# Altium PCB NSFTC.PcbDoc
Units mil, origin at the board's own origin, x right, y up, seen from the top; angles counter-clockwise.
Board outline 2283.46 x 1496.06 mil, 2 copper layers (Top Layer, Bottom Layer); 47 components, 70 nets, 256 pads, 10 vias.
Unrouted connection lines stored in the file: 79.
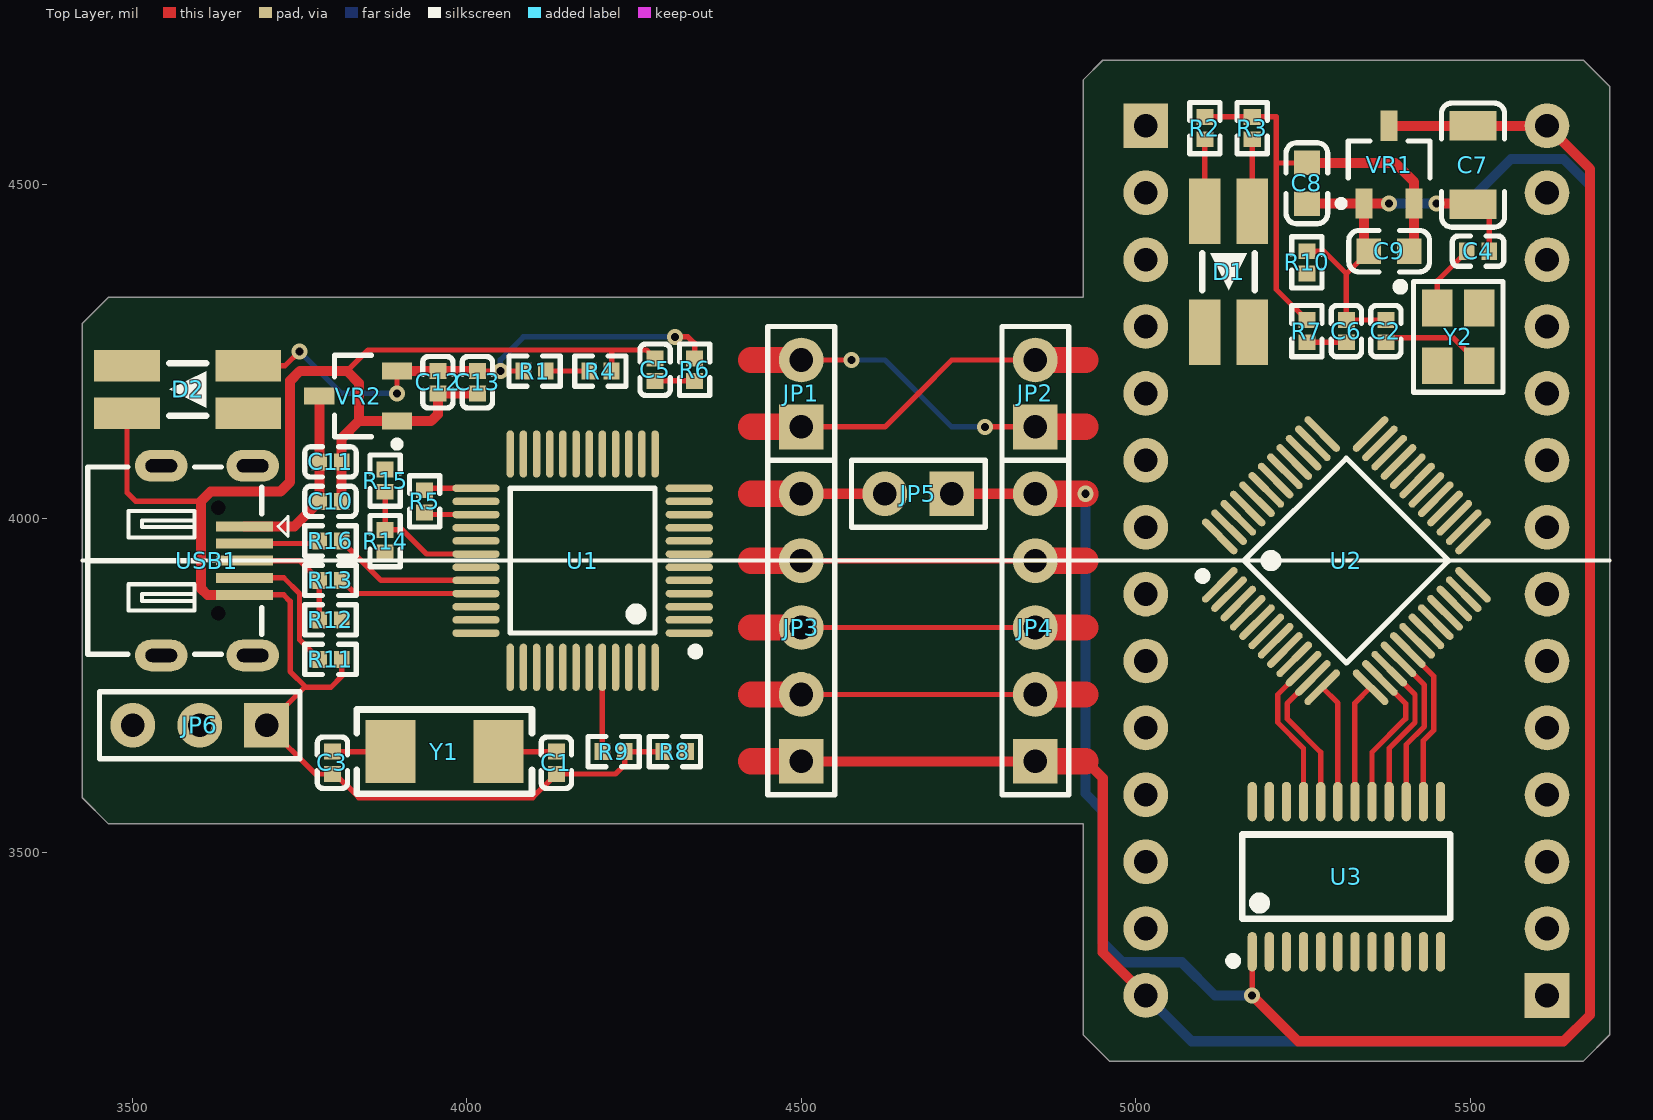
[diagram p0: Top Layer view]
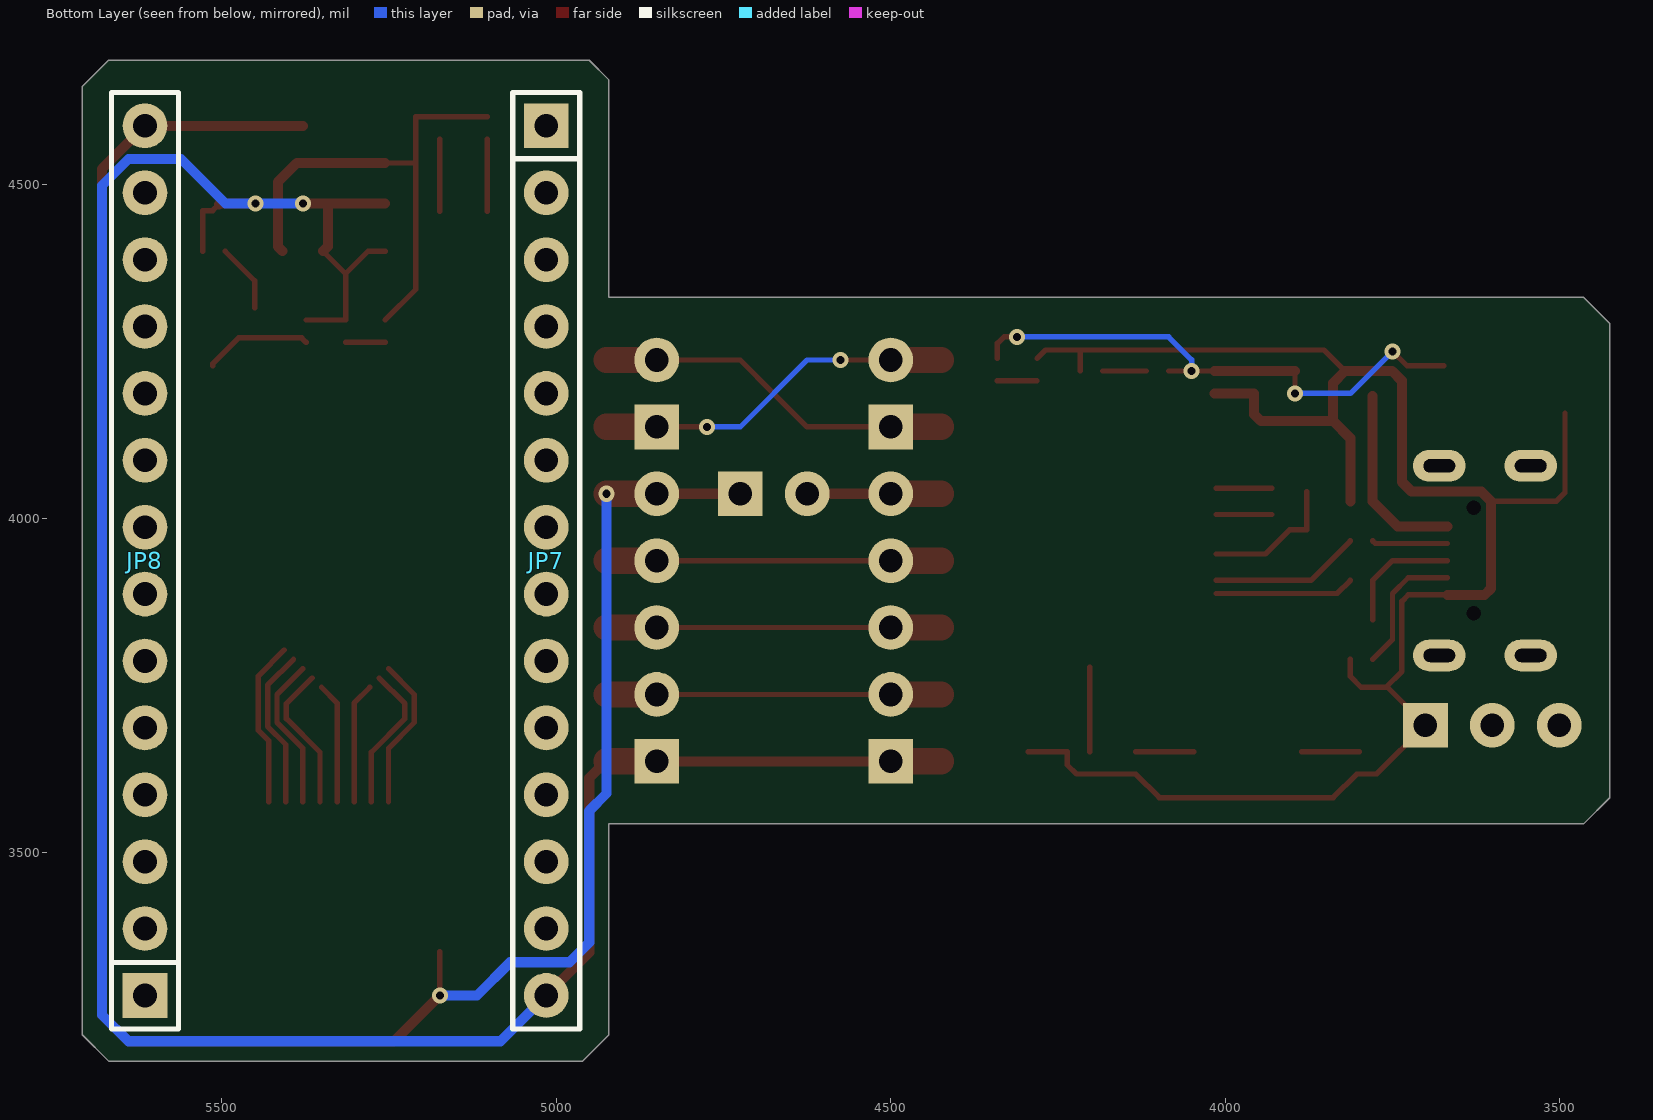
[diagram p1: Bottom Layer view, seen from below]

## Layer stack, top to bottom
Top Solder: solder mask 0.4, Solder Resist, Dk 3.5
Top Layer: signal copper 1.4
Dielectric 1: dielectric 12.6, FR-4, Dk 4.8
Bottom Layer: signal copper 1.4
Bottom Solder: solder mask 0.4, Solder Resist, Dk 3.5

## Board outline
3464.57,3543.31 3425.2,3582.68 3425.2,4291.34 3464.57,4330.71 4921.26,4330.71 4921.26,4655.51 4950.79,4685.04 5669.29,4685.04 5708.66,4645.67 5708.66,3228.35 5669.29,3188.98 4960.63,3188.98 4921.26,3228.35 4921.26,3543.31

## Design rules (kind name [scope] priority, off if disabled: settings)
AssemblyTestpoint AssemblyTestpoint_4 [All] p2: testpointundercomponent=TRUE minsize=40 maxsize=100 preferedsize=60 minholesize=0 maxholesize=40 preferedholesize=32 testpointgrid=1 usegrid=TRUE gridtolerance=0.01 allowsidetop=TRUE allowsidebottom=TRUE
AssemblyTestpoint AssemblyTestpoint_3 [All] p3: testpointundercomponent=TRUE minsize=40 maxsize=100 preferedsize=60 minholesize=0 maxholesize=40 preferedholesize=32 testpointgrid=1 usegrid=TRUE gridtolerance=0.01 allowsidetop=TRUE allowsidebottom=TRUE
AssemblyTestpoint AssemblyTestpoint_2 [All] p4: testpointundercomponent=TRUE minsize=40 maxsize=100 preferedsize=60 minholesize=0 maxholesize=40 preferedholesize=32 testpointgrid=1 usegrid=TRUE gridtolerance=0.01 allowsidetop=TRUE allowsidebottom=TRUE
AssemblyTestpoint AssemblyTestpoint_1 [All] p5: testpointundercomponent=TRUE minsize=40 maxsize=100 preferedsize=60 minholesize=0 maxholesize=40 preferedholesize=32 testpointgrid=1 usegrid=TRUE gridtolerance=0.01 allowsidetop=TRUE allowsidebottom=TRUE
Clearance [All] p1: gap=6 ignorepadtopadclearanceinfootprint=FALSE
HoleSize [All] p1: absolutevalues=TRUE maxlimit=250 minlimit=11.81 maxpercent=80.000 minpercent=20.000
HoleToHoleClearance [All] p1: gap=18 allowstackedmicrovias=TRUE
MinimumSolderMaskSliver [All] p1: minsoldermaskwidth=6
PolygonConnect [All] p1: connectstyle=Relief reliefconductorwidth=10 reliefentries=4 polygonreliefangle="90 Angle" airgapwidth=10
RoutingCorners [All] p1: cornerstyle=Round minsetback=100 maxsetback=200
RoutingTopology [All] p1: topology=Daisy_Balanced
RoutingVias [All] p1: holewidth=12 width=24 viastyle="Through Hole" minholewidth=11.81 minwidth=23.62 maxholewidth=250 maxwidth=261.81
SilkToSilkClearance [All] p1: silktosilkclearance=6
SilkToSolderMaskClearance [IsPad] p1: minsilkscreentomaskgap=6 clearancetoexposedcopper=TRUE
SolderMaskExpansion [All] p1: expansion=2
UnRoutedNet [All] p1: checkbadconnections=TRUE
Width [All] p1: maxlimit=100 minlimit=6 preferedwidth=8
22 further rules are at their usual default settings.

## Components (designator, comment, footprint, x,y, rotation, side; value= is the part's Value field where it differs from the comment)
C1 "20pF (200) 5% 50V" 0402_C 4133.86,3634.84 r270 top
C2 "10pF (100) 5% 50V" 0402_C 5374.02,4280.12 r90 top
C3 "20pF (200) 5% 50V" 0402_C 3799.21,3634.84 r270 top
C4 "10pF (100) 5% 50V" 0402_C 5511.81,4399.61 r0 top
C5 "100nF (104) 10% 16V" 0402_C 4281.5,4222.44 r270 top
C6 "100nF (104) 10% 16V" 0402_C 5314.96,4280.12 r270 top
C7 "10uF (106) 10% 50V" 1206_C 5504.26,4528.35 r90 top
C8 "100nF (104) 10% 50V" 0603_C 5255.91,4501.18 r90 top
C9 "4.7uF (475) 10% 16V" 0603_C 5378.94,4399.61 r0 top
C10 "4.7uF (475) 20% 10V" 0402_C 3796.26,4025.59 r180 top
C11 "4.7uF (475) 20% 10V" 0402_C 3796.26,4084.55 r180 top
C12 "100nF (104) 10% 16V" 0402_C 3956.69,4203.74 r90 top
C13 "4.7uF (475) 20% 10V" 0402_C 4015.75,4203.74 r90 top
D1 "LED_BI" LED_BI 5138.78,4368.9 r90 top
D2 "LED_BI" LED_BI 3582.68,4192.91 r0 top
JP1 "HDR-1X2" HDR2.54-LI-2P 4500,4187.01 r90 top
JP2 "HDR-1X2" HDR2.54-LI-2P 4850,4187.01 r90 top
JP3 "HDR-1X5" HDR2.54-LI-5P 4500,3837.01 r90 top
JP4 "HDR-1X5" HDR2.54-LI-5P 4850,3837.01 r90 top
JP5 "PWR" HDR2.54-LI-2P 4675,4037.01 r180 top
JP6 "HDR-1X3" HDR2.54-LI-3P 3600.79,3690.94 r180 top
JP7 "HDR-1X14" HDR2.54-LI-14P 5014.96,3937.01 r270 bottom locked
JP8 "HDR-1X14" HDR2.54-LI-14P 5614.96,3937.01 r90 bottom locked
R1 "4.7KΩ (4701) ±1%" 0402_R 4101.38,4220.47 r180 top
R2 "220Ω (2200) ±1%" 0402_R 5103.35,4583.66 r90 top
R3 "220Ω (2200) ±1%" 0402_R 5174.21,4583.66 r90 top
R4 "4.7KΩ (4701) ±1%" 0402_R 4199.8,4220.47 r180 top
R5 "100Ω (1000) ±1%" 0402_R 3937.01,4025.59 r270 top
R6 "100KΩ (1003) ±1%" 0402_R 4340.55,4222.44 r90 top
R7 "100KΩ (1003) ±1%" 0402_R 5255.91,4280.12 r90 top
R8 "10KΩ (1002) ±1%" 0402_R 4311.02,3651.57 r0 top
R9 "100KΩ (1003) ±1%" 0402_R 4219.49,3651.57 r0 top
R10 "100KΩ (1003) ±1%" 0402_R 5255.91,4382.87 r90 top
R11 "100KΩ (1003) ±1%" 0402_R 3796.26,3789.37 r0 top
R12 "1.5KΩ (1501) ±1%" 0402_R 3796.26,3848.43 r0 top
R13 "22Ω (22R0) ±1%" 0402_R 3796.26,3907.48 r0 top
R14 "220Ω (2200) ±1%" 0402_R 3877.95,3966.27 r270 top
R15 "220Ω (2200) ±1%" 0402_R 3877.95,4056.71 r270 top
R16 "22Ω (22R0) ±1%" 0402_R 3796.26,3966.54 r0 top
U1 "STM32F103CBT6" LQFP-48_7x7x05P 4173.23,3937.01 r90 top
U2 "STM32F103CBT6" LQFP-48_7x7x05P 5314.96,3937.01 r315 top
U3 "SN74LVC4245APWRG4" TSSOP-24 5314.96,3464.57 r0 top
USB1 "USB-5P" USB-MICRO_D 3543.31,3937.01 r270 top
VR1 "XC6206P332MR" SOT-23-3L 5378.94,4528.94 r270 top
VR2 "XC6206P332MR" SOT-23-3L 3837.6,4183.07 r0 top
Y1 "8MHz ±20ppm 20pF" SMD-5032_2P 3966.54,3651.57 r0 top
Y2 "16MHZ 9PF 10PPM" SMD-3225_4P 5482.28,4271.65 r270 top

## Footprints (in the part's own frame and the unit in brackets; to place one, negate y for a bottom-side part, rotate by r counter-clockwise, add the part's x,y. Pads: shape width x height; smd on the part's side, far side on the other; paste and mask are expansions set on the pad)
0402_C [mm]
  rect 0.6x0.65 smd mask+0.051: 1(-0.425,0) 2(0.425,0)
  silkscreen extent -0.97,-0.58 0.98,0.58, body extent -0.48,-0.3 0.52,0.3, height 0.2
0402_R [mm]
  rect 0.6x0.65 smd mask+0.051: 1(-0.425,0) 2(0.425,0)
  silkscreen extent -0.98,-0.57 0.98,0.58, body extent -0.57,-0.27 0.58,0.28, height 0.41
0603_C [mm]
  rect 0.93x0.98 smd: 1(-0.77,0) 2(0.77,0)
  silkscreen extent -1.54,-0.79 1.54,0.79, body extent -0.8,-0.4 0.8,0.4, height 0.3
1206_C [mm]
  rect 1.13x1.8 smd: 1(-1.49,0) 2(1.49,0)
  silkscreen extent -2.36,-1.2 2.36,1.2, body extent -1.6,-0.81 1.6,0.79, height 1
HDR2.54-LI-2P [mm] "排针，2脚"
  rect 1.7x1.7 hole 0.9: 1(-1.27,0)
  round 1.7 hole 0.9: 2(1.27,0)
  silkscreen extent -2.54,-1.27 2.54,1.27, body extent -2.54,-1.27 2.54,1.27, height 8.5
HDR2.54-LI-3P [mm] "排针，3脚"
  rect 1.7x1.7 hole 0.9: 1(-2.54,0)
  round 1.7 hole 0.9: 2(0,0) 3(2.54,0)
  silkscreen extent -3.81,-1.27 3.81,1.27, body extent -3.81,-1.27 3.81,1.27, height 8.5
HDR2.54-LI-5P [mm] "排针，5脚"
  rect 1.7x1.7 hole 0.9: 1(-5.08,0)
  round 1.7 hole 0.9: 2(-2.54,0) 3(0,0) 4(2.54,0) 5(5.08,0)
  silkscreen extent -6.35,-1.27 6.35,1.27, body extent -6.35,-1.27 6.35,1.27, height 8.5
HDR2.54-LI-14P [mm] "排针，14脚"
  rect 1.7x1.7 hole 0.9: 1(-16.51,0)
  round 1.7 hole 0.9: 2(-13.97,0) 3(-11.43,0) 4(-8.89,0) 5(-6.35,0) 6(-3.81,0) 7(-1.27,0) 8(1.27,0) 9(3.81,0) 10(6.35,0) 11(8.89,0) 12(11.43,0) 13(13.97,0) 14(16.51,0)
  silkscreen extent -17.78,-1.27 17.78,1.27, body extent -17.78,-1.27 17.78,1.27, height 8.5
LED_BI [mm]
  rect 2.5x1.2 smd: 1(-2.3,0.9) 2(2.3,0.9) 3(2.3,-0.9) 4(-2.3,-0.9)
  silkscreen extent -0.7,-1 0.7,1
LQFP-48_7x7x05P [mm]
  oval 0.28x1.8 smd mask+0.051: 1(-2.75,-4.05) 2(-2.25,-4.05) 3(-1.75,-4.05) 4(-1.25,-4.05) 5(-0.75,-4.05) 6(-0.25,-4.05) 7(0.25,-4.05) 8(0.75,-4.05) 9(1.25,-4.05) 10(1.75,-4.05) 11(2.25,-4.05) 12(2.75,-4.05) 25(2.75,4.05) 26(2.25,4.05) 27(1.75,4.05) 28(1.25,4.05) 29(0.75,4.05) 30(0.25,4.05) 31(-0.25,4.05) 32(-0.75,4.05) 33(-1.25,4.05) 34(-1.75,4.05) 35(-2.25,4.05) 36(-2.75,4.05)
  oval 1.8x0.28 smd mask+0.051: 13(4.05,-2.75) 14(4.05,-2.25) 15(4.05,-1.75) 16(4.05,-1.25) 17(4.05,-0.75) 18(4.05,-0.25) 19(4.05,0.25) 20(4.05,0.75) 21(4.05,1.25) 22(4.05,1.75) 23(4.05,2.25) 24(4.05,2.75) 37(-4.05,2.75) 38(-4.05,2.25) 39(-4.05,1.75) 40(-4.05,1.25) 41(-4.05,0.75) 42(-4.05,0.25) 43(-4.05,-0.25) 44(-4.05,-0.75) 45(-4.05,-1.25) 46(-4.05,-1.75) 47(-4.05,-2.25) 48(-4.05,-2.75)
  silkscreen extent -3.6,-4.42 2.75,2.75, body extent -4.5,-4.5 4.5,4.5, height 1.6
SMD-3225_4P [mm]
  rect 1.4x1.15 smd: 1(-1.1,-0.8) 2(1.1,-0.8) 3(1.1,0.8) 4(-1.1,0.8)
  silkscreen extent -2.1,-2.35 2.1,1.7, body extent -1.6,-1.25 1.6,1.25, height 0.61
SMD-5032_2P [mm]
  rect 1.9x2.4 smd: 1(-2.05,0) 2(2.05,0)
  silkscreen extent -3.32,-1.6 3.32,1.6
SOT-23-3L [mm] "http://www.aosmd.com/res/packaging_information/SOT-23-3L.pdf"
  rect 1.15x0.65 smd: 1(1.475,-0.95) 2(1.475,0.95) 3(-1.475,0)
  silkscreen extent -0.9,-1.95 1.6,1.55, body extent -0.9,-1.55 0.9,1.55, height 1.25
TSSOP-24 [mm]
  oval 0.35x1.5 smd: 1(-3.575,-2.85) 2(-2.925,-2.85) 3(-2.275,-2.85) 4(-1.625,-2.85) 5(-0.975,-2.85) 6(-0.325,-2.85) 7(0.325,-2.85) 8(0.975,-2.85) 9(1.625,-2.85) 10(2.275,-2.85) 11(2.925,-2.85) 12(3.575,-2.85) 13(3.575,2.85) 14(2.925,2.85) 15(2.275,2.85) 16(1.625,2.85) 17(0.975,2.85) 18(0.325,2.85) 19(-0.325,2.85) 20(-0.975,2.85) 21(-1.625,2.85) 22(-2.275,2.85) 23(-2.925,2.85) 24(-3.575,2.85)
  silkscreen extent -4.45,-3.35 3.95,1.6
USB-MICRO_D [mm] "micro型USB ，6.7*7.5*2.5mm"
  oval 1.2x2 hole 0.5 slot 1.2 at 90 deg: 0(-3.6,3.47) 0(-3.6,0) 0(3.6,3.47) 0(3.6,0)
  round 0 hole 0.55 unplated: 0(-2,2.17) 0(2,2.17)
  rect 0.381x2.15 smd: 1(-1.3,3.16) 2(-0.65,3.16) 3(0,3.16) 4(0.65,3.16) 5(1.3,3.16)
  silkscreen extent -3.56,-2.79 3.56,4.81, body extent -3.99,-2.75 3.99,3.95, height 2.79

## Part data
C1 C3: library part "0402 20pF (200) 5% 50V", "贴片电容", Package=0402, SuppliersPartNumber=C1554, ComponentLink1Description=供应商链接, ComponentLink1URL=http://www.szlcsc.com/product/details_1906.html, Supplier=LC
C2 C4: library part "0402 10pF (100) 5% 50V", "贴片电容", Package=0402, SuppliersPartNumber=C32949, ComponentLink1Description=供应商链接, ComponentLink1URL=http://www.szlcsc.com/product/details_33914.html, Supplier=LC
C5 C6 C12: library part "0402 100nF (104) 10% 16V", "贴片电容", Package=0402, SuppliersPartNumber=C1525, ComponentLink1Description=供应商链接, ComponentLink1URL=http://www.szlcsc.com/product/details_1877.html, Supplier=LC
C7: library part "1206 10uF (106) 10% 50V", "贴片电容", Package=1206, SuppliersPartNumber=C13585, ComponentLink1Description=供应商链接, ComponentLink1URL=http://www.szlcsc.com/product/details_14236.html, Supplier=LC
C8: library part "0603 100nF (104) 10% 50V", "贴片电容", Package=0603, SuppliersPartNumber=C14663, ComponentLink1Description=供应商链接, ComponentLink1URL=http://www.szlcsc.com/product/details_15331.html, Supplier=LC
C9: library part "0603 4.7uF (475) 10% 16V", "贴片电容", Package=0603, SuppliersPartNumber=C19666, ComponentLink1Description=供应商链接, ComponentLink1URL=http://www.szlcsc.com/product/details_20375.html, Supplier=LC
C10 C11 C13: library part "0402 4.7uF (475) 20% 10V", "贴片电容", Package=0402, SuppliersPartNumber=C23733, ComponentLink1Description=供应商链接, ComponentLink1URL=http://www.szlcsc.com/product/details_24469.html, Supplier=LC
JP1 JP2 JP5: library part "Header 2", "2P接插件", BOM名称=2P接插件, 学习资源=www.ooocke.com, 版权归属=源创客
JP3 JP4: library part "Header 5", "5P接插件", BOM名称=5P接插件, 学习资源=www.ooocke.com, 版权归属=源创客
JP6: library part "Header 3", "3P接插件", BOM名称=3P接插件, 学习资源=www.ooocke.com, 版权归属=源创客
JP7 JP8: library part "Header 14", "14P接插件", BOM名称=14P接插件, 学习资源=www.ooocke.com, 版权归属=源创客
R1 R4: library part "0402 4.7KΩ (4701) 1%", "贴片电阻", Package=0402, SuppliersPartNumber=C25900, ComponentLink1Description=供应商链接, ComponentLink1URL=http://www.szlcsc.com/product/details_26643.html, Supplier=LC
R2 R3 R14 R15: library part "0402 220Ω (2200) 1%", "贴片电阻", Package=0402, SuppliersPartNumber=C25091, ComponentLink1Description=供应商链接, ComponentLink1URL=http://www.szlcsc.com/product/details_25834.html, Supplier=LC
R5: library part "0402 100Ω (1000) 1%", "贴片电阻", Package=0402, SuppliersPartNumber=C25076, ComponentLink1Description=供应商链接, ComponentLink1URL=http://www.szlcsc.com/product/details_25819.html, Supplier=LC
R6 R7 R9 R10 R11: library part "0402 100KΩ (1003) 1%", "贴片电阻", Package=0402, SuppliersPartNumber=C25741, ComponentLink1Description=供应商链接, ComponentLink1URL=http://www.szlcsc.com/product/details_26484.html, Supplier=LC
R8: library part "0402 10KΩ (1002) 1%", "贴片电阻", Package=0402, SuppliersPartNumber=C25744, ComponentLink1Description=供应商链接, ComponentLink1URL=http://www.szlcsc.com/product/details_26487.html, Supplier=LC
R12: library part "0402 1.5KΩ (1501) 1%", "贴片电阻", Package=0402, SuppliersPartNumber=C25867, ComponentLink1Description=供应商链接, ComponentLink1URL=http://www.szlcsc.com/product/details_26610.html, Supplier=LC
R13 R16: library part "0402 22Ω (22R0) 1%", "贴片电阻", Package=0402, SuppliersPartNumber=C25092, ComponentLink1Description=供应商链接, ComponentLink1URL=http://www.szlcsc.com/product/details_25835.html, Supplier=LC
U1 U2: "ARM", Package=LQFP-48_7x7x05P, SuppliersPartNumber=C8304, ComponentLink1Description=供应商链接, ComponentLink1URL=http://www.szlcsc.com/product/details_8796.html, Supplier=LC
U3: library part SN74LVC4245APWRG4_[C7859], "74系列逻辑芯片", Package=TSSOP-24, SuppliersPartNumber=C7859, ComponentLink1Description=供应商链接, ComponentLink1URL=http://www.szlcsc.com/product/details_8336.html, Supplier=LC
USB1: "微型USB母座", BOM名称=微型USB母座, 学习资源=www.ooocke.com, 版权归属=源创客
VR1 VR2: library part "SOT-23 XC6206P332MR", "低压差线性稳压(LDO)", Package=SOT-23, SuppliersPartNumber=C5446, ComponentLink1Description=供应商链接, ComponentLink1URL=http://www.szlcsc.com/product/details_5896.html, Supplier=LC
Y1: library part "SMD-5032_2P 8MHz 20ppm 20pF", "贴片晶振", Package=SMD-5032_2P, SuppliersPartNumber=C115962, ComponentLink1Description=供应商链接, ComponentLink1URL=http://www.szlcsc.com/product/details_117214.html, Supplier=LC
Y2: library part "SMD-3225_4P  16MHZ 9PF 10PPM", "贴片晶振", Package=SMD-3225_4P, SuppliersPartNumber=C13738, ComponentLink1Description=供应商链接, ComponentLink1URL=http://www.szlcsc.com/product/details_14393.html, Supplier=LC

## Via types
v1: diameter 24, hole 12, Top Layer to Bottom Layer, 10 vias

## Nets (pads, with @x,y where several pads share a name; then routed paths per layer and width w, separated by ;. In a path a pad name is that pad's centre, name@x,y a point inside that pad or via, vN(x,y) a via of type N, cw(c..) or ccw(c..) an arc to the next point about the centre after c; other vN are vias at no path point)
3V3: C12.2 C13.2 D2.2 R1.2 R6.2 R12.2 U1.1 U1.9 U1.24 U1.36 U1.48 VR2.2 | length 828
  Top Layer w8: D2.2 3728.35,4228.35 v1(3750,4250) ; v1(3895.67,4187.01) VR2.2 ; C13.2 v1(4050.2,4220.47) R1.2 ; v1(4311.02,4271.65) 4330.71,4271.65 4340.55,4261.81 R6.2
  Top Layer w15: VR2.2 C12.2 C13.2
  Bottom Layer w8: v1(3750,4250) 3812.99,4187.01 v1(3895.67,4187.01) ; v1(4050.2,4220.47) 4050.2,4237.2 4084.65,4271.65 v1(4311.02,4271.65)
A0: JP7.10 U2.18
A1: JP7.9 U2.19
A2: JP7.8 U2.20
A3: JP7.7 U2.39
A4: JP7.6 U2.40
A5: JP7.5 U2.41
A6: JP7.4 U2.42
A7: JP7.3 U2.43
A8: JP8.11 U2.45
A9: JP8.10 U2.46
A10: JP8.7 U2.21
A11: JP8.9 U2.22
A12: JP7.2 U2.25
A13: JP8.12 U2.26
A14: JP7.1 U2.27
A15: JP8.6 U2.2 U2.28
CT_DIR: U2.33 U3.2
CT_NOE: U2.32 U3.22
D0: U2.10 U3.21 | length 230.7
  Top Layer w8: U2.10 5212.38,3736.99 5212.38,3694.99 5250.98,3656.38 U3.21
D1: U2.11 U3.20 | length 221.6
  Top Layer w8: U2.11 5226.38,3723.15 5226.38,3700.79 5276.57,3650.59 U3.20
D2: U2.12 U3.19 | length 180.6
  Top Layer w8: U2.12 5302.17,3724.31 U3.19
D3: U2.13 U3.18 | length 180.6
  Top Layer w8: U3.18 5327.76,3724.31 U2.13
D4: U2.14 U3.17 | length 221.6
  Top Layer w8: U3.17 5353.35,3650.59 5403.54,3700.79 5403.54,3723.15 U2.14
D5: U2.15 U3.16 | length 230.7
  Top Layer w8: U3.16 5378.94,3656.38 5417.54,3694.99 5417.54,3736.99 U2.15
D6: U2.16 U3.15 | length 239.9
  Top Layer w8: U2.16 5431.54,3750.83 5431.54,3689.19 5404.53,3662.17 U3.15
D7: U2.17 U3.14 | length 249
  Top Layer w8: U2.17 5445.54,3764.67 5445.54,3683.39 5430.12,3667.97 U3.14
FTC_CLK: JP3.2 JP4.2 U1.26 U2.37 | length 500
  Top Layer w8: JP3.2 JP4.2
  Top Layer w39.37: 4425,3737.01 JP3.2 ; JP4.2 4925,3737.01
FTC_DIO: JP3.3 JP4.3 R5.2 U1.27 U2.34 | length 820.9
  Top Layer w8: JP3.3 JP4.3 ; U1.27 3937.01,4005.91 U1.27 ; U1.27 3930.12,4005.91 U1.27
  Top Layer w39.37: 4425,3837.01 JP3.3 ; JP4.3 4925,3837.01
FTC_LDA: D1.1 U2.29
FTC_LDB: D1.4 U2.38
FTC_RST: C6.2 JP3.4 JP4.4 R7.1 U1.18 U2.7 | length 559.1
  Top Layer w8: JP3.4 JP4.4 ; R7.1 C6.2
  Top Layer w39.37: 4425,3937.01 JP3.4 ; JP4.4 4925,3937.01
FTC_RXD: JP1.1 JP2.2 U1.12 U2.31 | length 541.4
  Top Layer w8: JP1.1 4625,4137.01 4675,4187.01 4725,4237.01 JP2.2
  Top Layer w39.37: 4425,4137.01 JP1.1 ; JP2.2 4925,4237.01
FTC_TXD: JP1.2 JP2.1 U1.13 U2.30 | length 541.4
  Top Layer w8: JP1.2 v1(4575,4237.01) ; v1(4775,4137.01) JP2.1
  Top Layer w39.37: 4425,4237.01 JP1.2 ; JP2.1 4925,4137.01
  Bottom Layer w8: v1(4575,4237.01) 4625,4237.01 4725,4137.01 v1(4775,4137.01)
GND: C1.2 C2.2 C3.2 C4.2 C5.1 C6.1 C7.1 C8.1 C9.1 C10.1 C11.1 C12.1 C13.1 D2.4 JP3.1 JP4.1 JP6.1 JP7.14 R4.1 R8.1 R9.2 R10.2 R11.2 U1.8 U1.20 U1.23 U1.35 U1.47 U2.8 U2.23 U2.47 U3.11 U3.12 U3.13 USB1.5 VR1.1 VR2.1 | length 6585.1
  Top Layer w8: D2.4 3492.13,4038.66 3505.2,4025.59 3602.36,4025.59 ; USB1.5 3726.38,3885.83 3736,3876.2 3736,3771.55 3759.84,3747.7 ; R11.2 3812.99,3763.78 3796.92,3747.7 3759.84,3747.7 ; 3820.87,4220.47 3852.36,4251.97 4216.54,4251.97 ; R4.1 4216.54,4251.97 ; C5.1 4268.7,4251.97 4216.54,4251.97 ; R8.1 R9.2 4236.22,3631.89 4222.44,3618.11 C1.2 4098.43,3582.68 3838.58,3582.68 3803.15,3618.11 C3.2 3773.62,3618.11 JP6.1 3757.55,3747.7 3759.84,3747.7 ; R10.2 5281.3,4399.61 5314.96,4365.95 ; C9.1 5314.96,4365.95 ; C2.2 C6.1 5314.96,4365.95 ; C7.1 5513.78,4460.17 5528.54,4460.17 C4.2
  Top Layer w15: USB1.5 3612.2,3885.83 3602.36,3895.67 3602.36,4025.59 3616.85,4040.07 3721.18,4040.07 3736,4054.9 3736,4206.08 3750.39,4220.47 3820.87,4220.47 3838.58,4202.76 3838.58,4145.67 ; C10.1 C11.1 3812.99,4120.08 3838.58,4145.67 ; C13.1 C12.1 3956.69,4155.51 3946.85,4145.67 VR2.1 3838.58,4145.67 ; JP3.1 JP4.1 ; 4925,3637.01 4925.98,3637.01 4950.79,3612.2 4950.79,3351.18 JP7.14 ; C8.1 VR1.1 ; C9.1 5341.54,4406.69 VR1.1 ; v1(5378.94,4470.87) VR1.1 ; v1(5450,4470.87) 5503.08,4470.87 C7.1
  Top Layer w39.37: 4425,3637.01 JP3.1 ; JP4.1 4925,3637.01
  Bottom Layer w15: JP7.14 5083.46,3218.5 5639.76,3218.5 5679.13,3257.87 5679.13,4498.03 5639.76,4537.4 5561.02,4537.4 5494.49,4470.87 v1(5450,4470.87) v1(5378.94,4470.87)
NetC1_1: C1.1 U1.5 Y1.2 | length 86.6
  Top Layer w8: Y1.2 C1.1
NetC2_1: C2.1 U2.5 Y2.3 | length 161.4
  Top Layer w8: C2.1 5380.63,4270 5475,4270 5513.78,4231.22 Y2.3
NetC3_1: C3.1 U1.6 Y1.1 | length 86.6
  Top Layer w8: C3.1 Y1.1
NetC4_1: C4.1 U2.6 Y2.1 | length 103
  Top Layer w8: Y2.1 5450.79,4355.32 C4.1
NetC5_2: C5.2 R6.1 U1.7 | length 59.1
  Top Layer w8: C5.2 R6.1
NetD1_2: D1.2 R2.1 | length 107.5
  Top Layer w8: D1.2 R2.1
NetD1_3: D1.3 R3.1 | length 107.5
  Top Layer w8: D1.3 R3.1
NetD2_1: D2.1 R14.2
NetD2_3: D2.3 R15.1
NetR1_1: R1.1 R4.2 U1.10 | length 65
  Top Layer w8: R1.1 R4.2
NetR5_1: R5.1 U1.25 | length 495.1
  Top Layer w8: R5.1@3930.12,4045.28 U1.25 ; R5.1@3930.12,4045.28 U1.25 ; R5.1@3930.12,4045.28 R5.1@3937.01,4045.28 ; R5.1@3930.12,4045.28 R5.1@3937.01,4045.28 ; R5.1@3930.12,4045.28 U1.25 ; R5.1@3937.01,4045.28 U1.25 ; R5.1@3937.01,4045.28 U1.25 ; R5.1@3937.01,4045.28 U1.25
NetR8_2: R8.2 U1.2
NetR9_1: R9.1 U1.44 | length 126
  Top Layer w8: R9.1 U1.44
NetR10_1: R10.1 U2.44
NetR11_1: R11.1 USB1.4 | length 202.7
  Top Layer w8: USB1.4 3726.38,3911.42 3750,3887.8 3750,3818.9 R11.1
NetR12_1: R12.1 R13.1 USB1.3 | length 183.1
  Top Layer w8: USB1.3 3750,3937.01 R13.1 R12.1
NetR16_1: R16.1 USB1.2 | length 113.4
  Top Layer w8: USB1.2 3775.59,3962.6 R16.1
NOE: JP8.8 U2.4
NWE: JP8.13 U2.3
OD0: JP7.11 U3.3
OD1: JP7.12 U3.4
OD2: JP7.13 U3.5
OD3: JP8.1 U3.6
OD4: JP8.2 U3.7
OD5: JP8.3 U3.8
OD6: JP8.4 U3.9
OD7: JP8.5 U3.10
ST_LED: R14.1 R15.2 U1.30 | length 207.8
  Top Layer w8: R15.2 R14.1 3903.85,3983 3940,3946.85 U1.30
SWCLK: JP6.2 U1.37
SWDIO: JP6.3 U1.34
U5V: C10.2 C11.2 JP3.5 JP5.2 USB1.1 VR2.3 | length 484.8
  Top Layer w15: USB1.1 3742.13,3988.19 C10.2 C11.2 VR2.3 ; JP3.5 JP5.2
  Top Layer w39.37: 4425,4037.01 JP3.5
USB_DM: R16.2 U1.32 | length 225.2
  Top Layer w8: R16.2 3872.05,3907.48 U1.32
USB_DP: R13.2 U1.33 | length 208.9
  Top Layer w8: R13.2 3832.68,3887.8 U1.33
VCC: C8.2 C9.2 R2.2 R3.2 R7.2 U2.1 U2.9 U2.24 U2.48 U3.23 U3.24 VR1.2 | length 753.8
  Top Layer w8: R2.2 R3.2 5210,4600.39 5210,4531.5 ; R7.2 5210,4342.76 5210,4531.5 ; C8.2 5210,4531.5
  Top Layer w15: C8.2 5387.99,4531.5 5416.34,4503.15 VR1.2 5416.34,4406.69 C9.2
VHI: C7.2 JP4.5 JP5.1 JP8.14 U3.1 VR1.3 | length 3344.4
  Top Layer w8: v1(5174.21,3287.01) U3.1
  Top Layer w15: JP5.1 JP4.5 ; v1(5174.21,3287.01) 5242.72,3218.5 5639.76,3218.5 5679.13,3257.87 5679.13,4522.83 JP8.14 C7.2 VR1.3
  Top Layer w39.37: JP4.5 v1(4925,4037.01)
  Bottom Layer w15: v1(4925,4037.01) 4925,3588.78 4950.79,3562.99 4950.79,3366.14 4980.31,3336.61 5068.9,3336.61 5118.5,3287.01 v1(5174.21,3287.01)
pads on no net: U1.3 U1.4 U1.11 U1.14 U1.15 U1.16 U1.17 U1.19 U1.21 U1.22 U1.28 U1.29 U1.31 U1.38 U1.39 U1.40 U1.41 U1.42 U1.43 U1.45 U1.46 U2.35 U2.36 USB1.0 Y2.2 Y2.4

## Silkscreen, mask and mechanical layers (free items; w line width, h text height)
Top Overlay:
  lines w6: 3425.2,3937.01 5708.66,3937.01
Top Solder:
  lines w39.37: 4425,3637.01 4500,3637.01 ; 4425,3737.01 4500,3737.01 ; 4425,3837.01 4500,3837.01 ; 4425,3937.01 4500,3937.01 ; 4425,4037.01 4500,4037.01 ; 4425,4137.01 4500,4137.01 ; 4425,4237.01 4500,4237.01 ; 4850,3637.01 4925,3637.01 ; 4850,3737.01 4925,3737.01 ; 4850,3837.01 4925,3837.01 ; 4850,3937.01 4925,3937.01 ; 4850,4037.01 4925,4037.01 ; 4850,4137.01 4925,4137.01 ; 4850,4237.01 4925,4237.01
Mechanical 1:
  the board outline again, w8
Drill Drawing:
  text "'.Legend'" at 6377.95,6338.58 h60